# Altium PCB LED_Fret2.PcbDoc
Units mm, origin at the board's own origin, x right, y up, seen from the top; angles counter-clockwise.
Board outline 10 x 64 mm, 2 copper layers (Top Layer, Bottom Layer); 13 components, 16 nets, 62 pads, 12 vias.
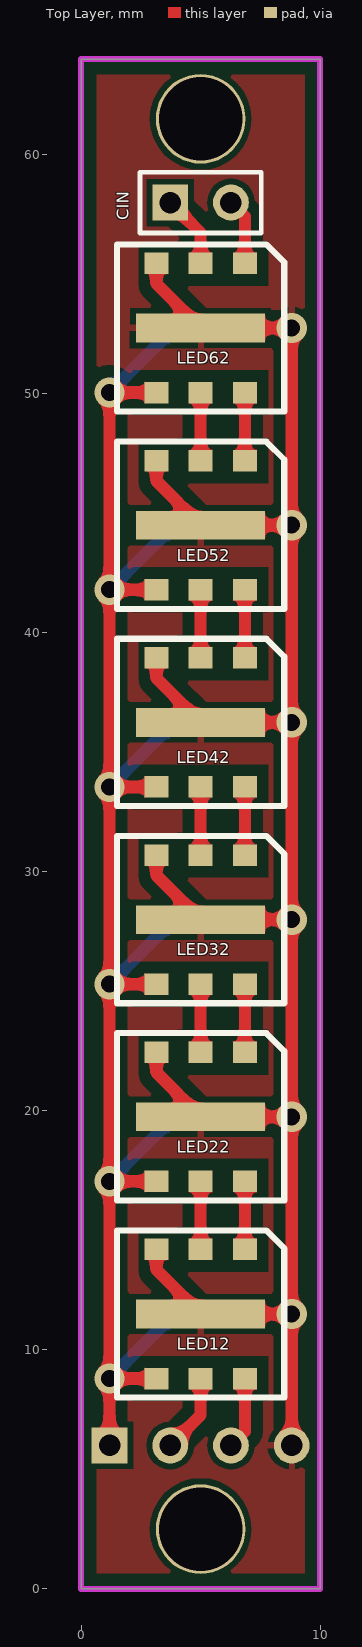
[diagram p0: Top Layer view]
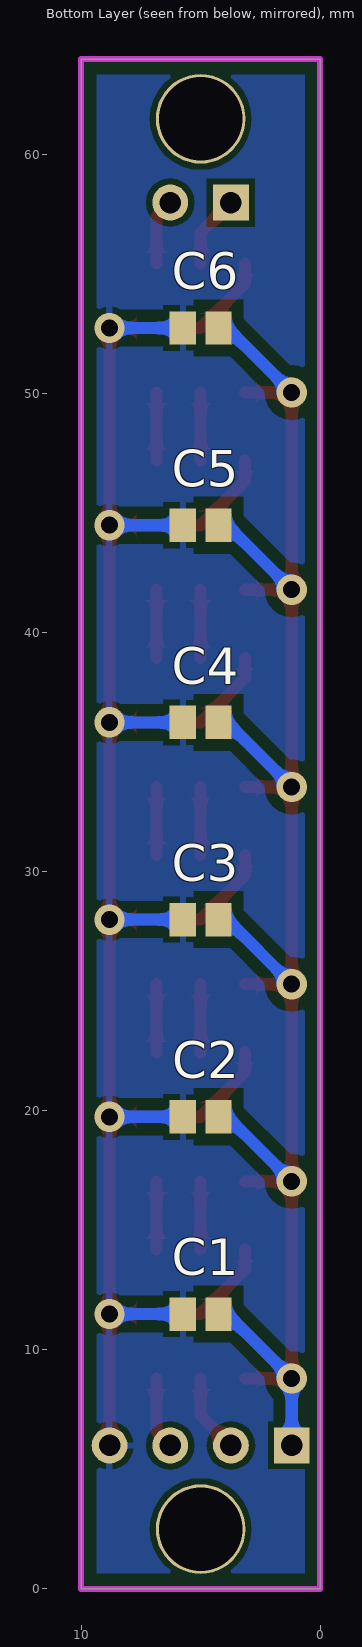
[diagram p1: Bottom Layer view, seen from below]

## Layer stack, top to bottom
Top Solder: solder mask 0.0102, Solder Resist, Dk 3.5
Top Layer: signal copper 0.0356
Dielectric 1: dielectric 0.32, FR-4, Dk 4.8
Bottom Layer: signal copper 0.0356
Bottom Solder: solder mask 0.0102, Solder Resist, Dk 3.5

## Board outline
0,0 0,64 10,64 10,0

## Design rules (kind name [scope] priority, off if disabled: settings)
Clearance [All] p1: gap=0.254 ignorepadtopadclearanceinfootprint=FALSE except(0.508: Arc-Fill Arc-Poly Arc-Region Track-Fill Track-Poly Track-Region SMDPad-Fill SMDPad-Poly SMDPad-Region Via-Fill Via-Poly Via-Region)
PolygonConnect [All] p1: connectstyle=Relief reliefconductorwidth=0.254 reliefentries=4 polygonreliefangle="90 Angle" airgapwidth=0.254
RoutingVias [All] p1: holewidth=0.711 width=1.27 viastyle="Through Hole" minholewidth=0.711 minwidth=1.27 maxholewidth=0.711 maxwidth=1.27
SolderMaskExpansion [All] p1: expansion=0.102
Width [All] p1: maxlimit=1.16 minlimit=0.1 preferedwidth=0.508
30 further rules are at their usual default settings.

## Classes and differential pairs
component class LED_Fret: LED11 LED21 LED31 LED41 LED51 LED61

## Components (designator, comment, footprint, x,y, rotation, side; value= is the part's Value field where it differs from the comment)
C1 "Cap Pol3" C0805 5,11.5 r0 bottom value=0.1uF
C2 "Cap Pol3" C0805 5,19.75 r0 bottom value=0.1uF
C3 "Cap Pol3" C0805 5,28 r0 bottom value=0.1uF
C4 "Cap Pol3" C0805 5,36.25 r0 bottom value=0.1uF
C5 "Cap Pol3" C0805 5,44.5 r0 bottom value=0.1uF
C6 "Cap Pol3" C0805 5,52.75 r0 bottom value=0.1uF
CIN "Header 2" HDR1X2 3.73,58 r0 top (schematic designator Input)
LED12 "APA102C" "RGB LED" 2.5,14 r270 top
LED22 "APA102C" "RGB LED" 2.5,22.25 r270 top
LED32 "APA102C" "RGB LED" 2.5,30.5 r270 top
LED42 "APA102C" "RGB LED" 2.5,38.75 r270 top
LED52 "APA102C" "RGB LED" 2.5,47 r270 top
LED62 "APA102C" "RGB LED" 2.5,55.25 r270 top

## Footprints (in the part's own frame and the unit in brackets; to place one, negate y for a bottom-side part, rotate by r counter-clockwise, add the part's x,y. Pads: shape width x height; smd on the part's side, far side on the other; paste and mask are expansions set on the pad)
C0805 [mm] "Chip Capacitor, Body 2.0x1.3mm, IPC High Density"
  rect 1.1x1.4 smd: 1(-0.75,0) 2(0.75,0)
  body extent -1.1,-0.72 1.1,0.72, height 1.4
HDR1X2 [mm] "Connector; Header; 2 Position"
  rect 1.5x1.5 hole 0.9: 1(0,0)
  round 1.5 hole 0.9: 2(2.54,0)
  silkscreen extent -1.27,-1.27 3.81,1.27
"RGB LED" [mm] "APA102C - 6-Pin SMT RGB LED"
  rect 0.9x1 smd: 0(-0.2,4.35) 1(-0.2,2.5) 2(-0.2,0.65) 3(5.2,4.35) 4(5.2,2.5) 5(5.2,0.65)
  rect 1.2x5.4 smd: GND(2.5,2.5)
  silkscreen extent -1,-1 6,6, body extent 0,0 5,5, height 1.4

## Part data
C1 C2 C3 C4 C5 C6: "Polarized Capacitor (Surface Mount)", LatestRevisionDate=29-May-2009, LatestRevisionNote="IPC-7351 Footprint Added.", PackageDescription="Chip Capacitor", PackageReference=C0805, Published=8-Jun-2000, Publisher="Altium Limited"
CIN: "Header, 2-Pin", LatestRevisionDate=17-Jul-2002, LatestRevisionNote="Re-released for DXP Platform.", Publisher="Altium Limited"
LED12 LED22 LED32 LED42 LED52 LED62: library part "RGB LED"

## Free pads (board coordinates)
  rect 1.5x1.5 hole 0.9: 1(1.19,6)
  round 1.5 hole 0.9: 2(3.73,6) 3(6.27,6) 4(8.81,6)
  round 3.75 hole 3.5: M1(5,2.5) M2(5,61.5)

## Via types
v1: diameter 1.27, hole 0.711, Top Layer to Bottom Layer, 12 vias

## Nets (pads, with @x,y where several pads share a name; then routed paths per layer and width w, separated by ;. In a path a pad name is that pad's centre, name@x,y a point inside that pad or via, vN(x,y) a via of type N, cw(c..) or ccw(c..) an arc to the next point about the centre after c; other vN are vias at no path point)
2-1C: LED12.1 LED22.4 | length 2.9
  Top Layer w0.508: LED12.1 LED22.4
2-1D: LED12.0 LED22.3 | length 2.9
  Top Layer w0.508: LED12.0 LED22.3
3-2C: LED22.1 LED32.4 | length 2.9
  Top Layer w0.508: LED22.1 LED32.4
3-2D: LED22.0 LED32.3 | length 2.9
  Top Layer w0.508: LED22.0 LED32.3
4-3C: LED32.1 LED42.4 | length 2.9
  Top Layer w0.508: LED32.1 LED42.4
4-3D: LED32.0 LED42.3 | length 2.9
  Top Layer w0.508: LED32.0 LED42.3
5-4C: LED42.1 LED52.4 | length 2.9
  Top Layer w0.508: LED42.1 LED52.4
5-4D: LED42.0 LED52.3 | length 2.9
  Top Layer w0.508: LED42.0 LED52.3
6-5C: LED52.1 LED62.4 | length 2.9
  Top Layer w0.508: LED52.1 LED62.4
6-5D: LED52.0 LED62.3 | length 2.9
  Top Layer w0.508: LED52.0 LED62.3
CIN: CIN.1 LED62.1 | length 3.1
  Top Layer w0.508: CIN.1 5,56.73 LED62.1
COUT: LED12.4 pad.2 | length 3.3
  Top Layer w0.508: pad.2 5,7.27 LED12.4
DIN: CIN.2 LED62.0 | length 2.8
  Top Layer w0.508: CIN.2 6.85,57.42 LED62.0
DOUT: LED12.3 pad.3 | length 3
  Top Layer w0.508: pad.3 6.85,6.58 LED12.3
GND: C1.2 C2.2 C3.2 C4.2 C5.2 C6.2 LED12.2 LED12.GND LED22.2 LED22.GND LED32.2 LED32.GND LED42.2 LED42.GND LED52.2 LED52.GND LED62.2 LED62.GND pad.4 | length 108.8
  Top Layer w0.508: LED12.2 3.15,13.35 LED12.GND v1(8.81,11.5) ; LED22.2 3.15,21.6 LED22.GND v1(8.81,19.75) ; LED32.2 3.15,29.85 LED32.GND v1(8.81,28) ; LED42.2 3.15,38.1 LED42.GND v1(8.81,36.25) ; LED52.2 3.15,46.35 LED52.GND v1(8.81,44.5) ; LED62.2 3.15,54.6 LED62.GND v1(8.81,52.75) v1(8.81,44.5) ; pad.4 v1(8.81,11.5) ; v1(8.81,11.5) v1(8.81,19.75) ; v1(8.81,19.75) v1(8.81,28) ; v1(8.81,28) v1(8.81,36.25) ; v1(8.81,36.25) v1(8.81,44.5)
  Bottom Layer w0.508: C1.2 v1(8.81,11.5) ; C2.2 v1(8.81,19.75) ; C3.2 v1(8.81,28) ; C4.2 v1(8.81,36.25) ; C5.2 v1(8.81,44.5) ; C6.2 v1(8.81,52.75)
VCC: C1.1 C2.1 C3.1 C4.1 C5.1 C6.1 LED12.5 LED22.5 LED32.5 LED42.5 LED52.5 LED62.5 pad.1 | length 83.3
  Top Layer w0.508: pad.1 v1@1.19,8.75 ; LED12.5 1.24,8.8 v1@1.19,8.75 ; LED22.5 v1(1.19,17.05) ; LED32.5 v1(1.19,25.3) ; LED42.5 v1(1.19,33.55) ; LED52.5 v1(1.19,41.8) ; LED62.5 v1(1.19,50.05) v1(1.19,41.8) ; v1@1.19,8.75 v1(1.19,8.8) v1(1.19,17.05) ; v1(1.19,17.05) v1(1.19,25.3) ; v1(1.19,25.3) v1(1.19,33.55) ; v1(1.19,33.55) v1(1.19,41.8)
  Bottom Layer w0.508: pad.1 v1@1.19,8.44 ; v1(1.19,8.8) 3.89,11.5 C1.1 ; v1(1.19,17.05) 3.89,19.75 C2.1 ; v1(1.19,25.3) 3.89,28 C3.1 ; v1(1.19,33.55) 3.89,36.25 C4.1 ; v1(1.19,41.8) 3.89,44.5 C5.1 ; v1(1.19,50.05) 3.89,52.75 C6.1

## Polygon pours and split planes (outlines as drawn)
GND on Bottom Layer (solid, pour order 6): 0,0 10,0 10,64 0,64
GND on Top Layer (solid, pour order 8): 0,64 10,64 10,0 0,0

## Keep-outs
Keep-Out Layer:
  the board outline again, w0.254